# Altium PCB jlinkv9_only_usbc.PcbDoc
Units mil, origin at the board's own origin, x right, y up, seen from the top; angles counter-clockwise.
Board outline 709 x 1386.5 mil, 2 copper layers (Top Layer, Bottom Layer); 58 components, 74 nets, 200 pads, 169 vias.
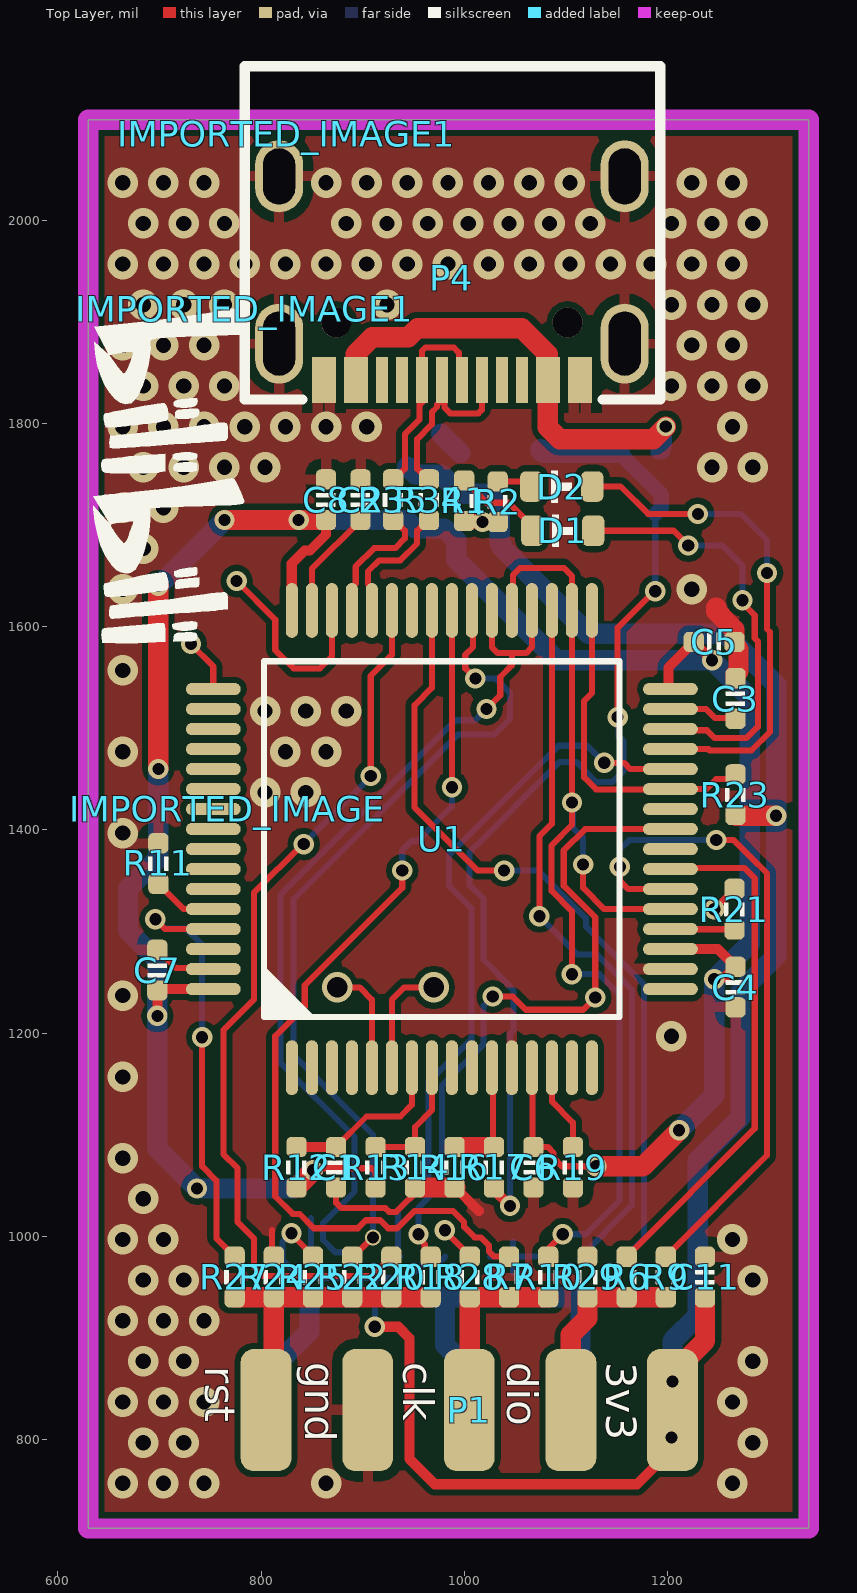
[diagram p0: Top Layer view]
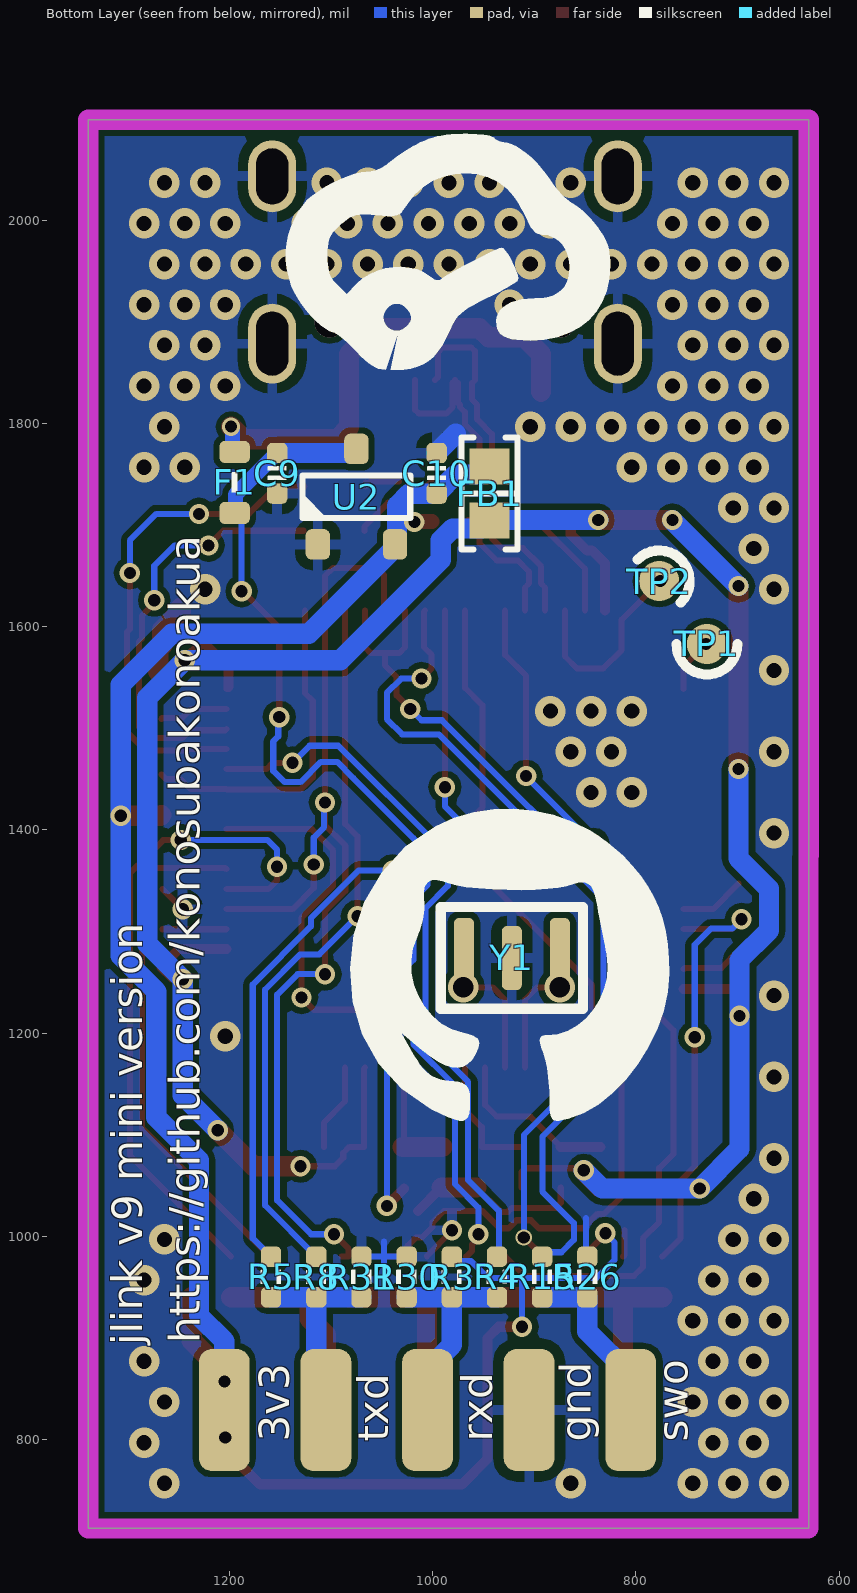
[diagram p1: Bottom Layer view, seen from below]
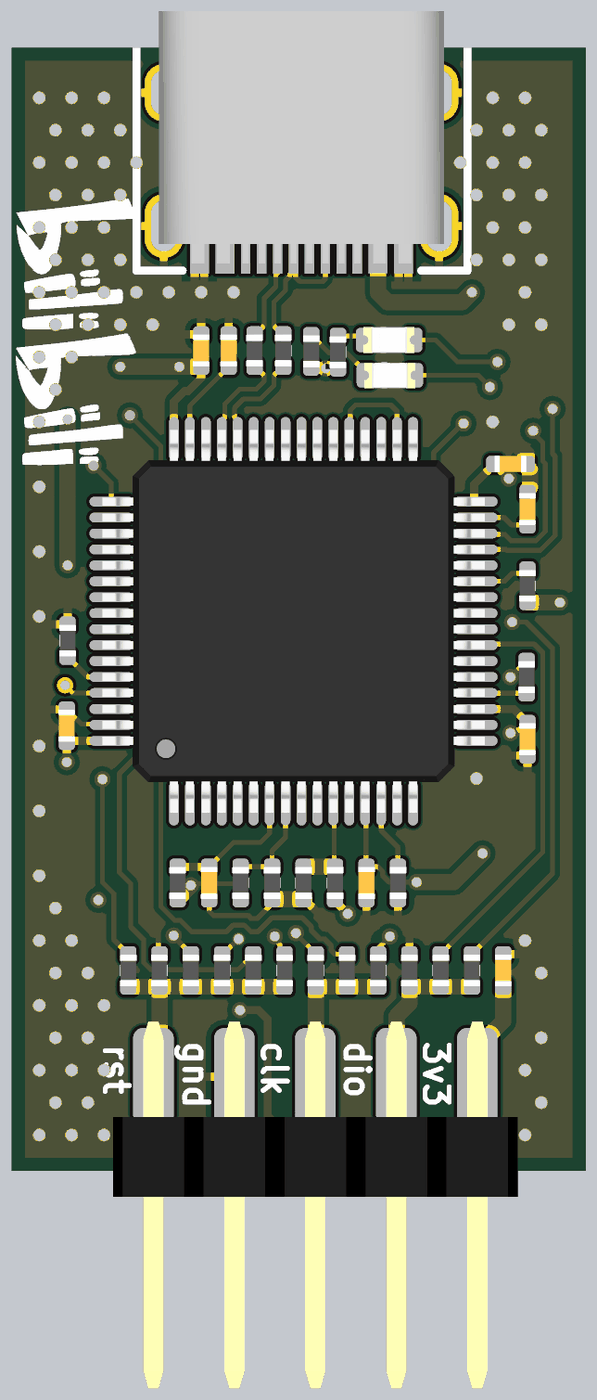
[diagram p2: 3D render of the assembled board from above, using the file's embedded part models]
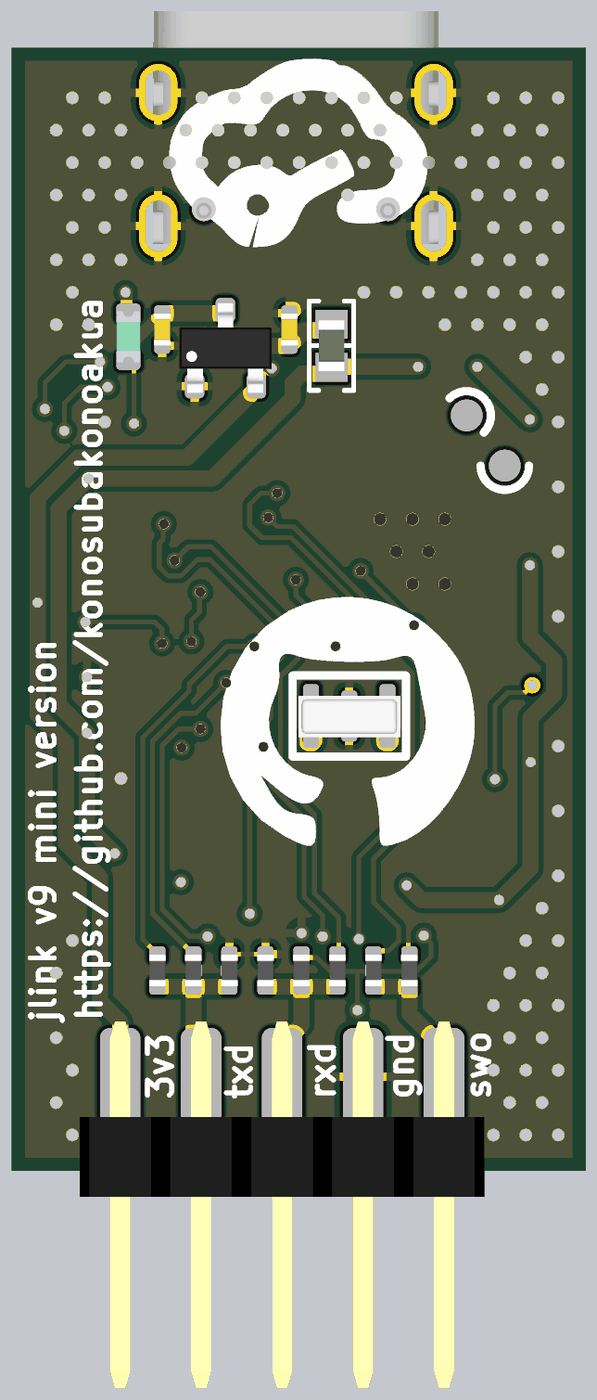
[diagram p3: 3D render of the assembled board from below, using the file's embedded part models]

## Layer stack, top to bottom
Top Solder: solder mask 0.4, Solder Resist, Dk 3.5
Top Layer: signal copper 1.4
Dielectric 1: dielectric 12.6, FR-4, Dk 4.8
Bottom Layer: signal copper 1.4
Bottom Solder: solder mask 0.4, Solder Resist, Dk 3.5

## Board outline
629.95,1375 629.95,2099 1338.95,2099 1338.95,712.5 630,712.5

## Design rules (kind name [scope] priority, off if disabled: settings)
Clearance [All] p1: gap=6 ignorepadtopadclearanceinfootprint=FALSE
ComponentClearance [All] p1: gap=0 collisioncheckmode=3 verticalgap=0 showdistances=FALSE
DiffPairsRouting [All] p1: maxlimit=10 minlimit=6 mostfreqgap=6 toplayer_minwidth=6 toplayer_maxwidth=20 toplayer_prefwidth=6 bottomlayer_minwidth=6 bottomlayer_maxwidth=20 bottomlayer_prefwidth=6 maxuncoupledlength=500
PolygonConnect [All] p1: connectstyle=Relief reliefconductorwidth=10 reliefentries=4 polygonreliefangle="90 Angle" airgapwidth=10
RoutingVias [All] p1: holewidth=28 width=50 viastyle="Through Hole" minholewidth=12 minwidth=20 maxholewidth=28 maxwidth=50
SolderMaskExpansion [All] p1: expansion=4
Width [All] p1: maxlimit=100 minlimit=6 preferedwidth=10
28 further rules are at their usual default settings.

## Classes and differential pairs
component class usb_conn: F1 P4 R34 R35
component class stm32: C1 C2 C3 C4 C5 C6 C7 C8 C9 C10 C11 D1 D2 FB1 P1 R1 R2 R3 R4 R5 R6 R7 R8 R9 R10 R11 R12 R13 R14 R15 R16 R17 R18 R19 R20 R21 R22 R23 R24 R25 R26 R27 R28 R29 R30 R31 TP1 TP2 U1 U2 Y1
differential pair usb_c: +usb_c_P -usb_c_N
differential pair mcu_usb: +mcu_usb_P -mcu_usb_N

## Components (designator, comment, footprint, x,y, rotation, side; value= is the part's Value field where it differs from the comment)
C1 "C0402" CAP_0402 873.86,1068.06 r270 top value=0.1u
C2 "C0402" CAP_0402 898,1725.06 r270 top value=2.2u
C3 "C0402" CAP_0402 1267,1529.39 r270 top value=2.2u
C4 "C0402" CAP_0402 1267,1245.39 r90 top value=0.1u
C5 "C0402" CAP_0402 1246,1585.06 r180 top value=0.1u
C6 "C0402" CAP_0402 1068.14,1068.06 r90 top value=0.1u
C7 "C0402" CAP_0402 698,1262.06 r270 top value=0.1u
C8 "C0402" CAP_0402 864,1725.06 r270 top value=0.1u
C9 "C0402" CAP_0402 1153,1751.06 r90 bottom value=0.1uf
C10 "C0402" CAP_0402 996,1751.06 r270 bottom value=0.1uf
C11 "C0402" CAP_0402 1237,960.06 r270 top value=0.1uf
D1 "color?" LED_0603 1097,1694.54 r0 top
D2 "color?" LED_0603 1096,1738.06 r0 top
F1 "500mA" PPTC_0603 1194.87,1742.06 r270 bottom
FB1 "Fer" "FER 0603/1608" 944,1731.06 r90 bottom
IMPORTED_IMAGE "Comment" IMPORTED_IMAGE 767,1421 r0 top
IMPORTED_IMAGE1 "Comment" IMPORTED_IMAGE 825.17,2085.07 r0 top (schematic designator IMPORTED_IMAGE)
IMPORTED_IMAGE1 "Comment" IMPORTED_IMAGE 783.95,1912.92 r270 top (schematic designator IMPORTED_IMAGE)
P1 "HDR2x5_2.54" HDR2X5_2.54_180H 1205,829.06 r270 top
P4 "TypeC" USB_TypeC 987.84,1943 r180 top
R1 "220r" RES_0402 1000,1724.06 r270 top
R2 "220r" RES_0402 1033,1723.06 r270 top
R3 "220r" RES_0402 981.11,960.06 r90 bottom
R4 "220r" RES_0402 936.64,960.06 r270 bottom
R5 "220r" RES_0402 1159,960.06 r270 bottom
R6 "220r" RES_0402 1159.83,960.06 r270 top
R7 "220r" RES_0402 1044.08,960.06 r270 top
R8 "220r" RES_0402 1114.53,960.06 r270 bottom
R9 "220r" RES_0402 1198.42,960.06 r270 top
R10 "220r" RES_0402 1082.67,960.06 r270 top
R11 "10k" RES_0402 699,1367.06 r90 top
R12 "10k" RES_0402 835,1068.06 r270 top
R13 "10k" RES_0402 912.71,1068.06 r90 top
R14 "10k" RES_0402 951.57,1068.06 r90 top
R15 "220r" RES_0402 892.17,960.06 r270 bottom
R16 "10k" RES_0402 990.43,1068.06 r90 top
R17 "10k" RES_0402 1029.29,1068.06 r270 top
R18 "220r" RES_0402 966.92,960.06 r270 top
R19 "10k" RES_0402 1107,1068.06 r90 top
R20 "220r" RES_0402 928.33,960.06 r270 top
R21 "10k" RES_0402 1266,1322.06 r270 top
R22 "220r" RES_0402 889.75,960.06 r270 top
R23 "10k" RES_0402 1267,1434.73 r90 top
R24 "220k" RES_0402 812.58,960.06 r270 top
R25 "10k" RES_0402 851.17,960.06 r270 top
R26 "220k" RES_0402 847.7,960.06 r270 bottom
R27 "10k" RES_0402 774,960.06 r270 top
R28 "220k" RES_0402 1005.5,960.06 r270 top
R29 "220k" RES_0402 1121.25,960.06 r270 top
R30 "220k" RES_0402 1025.59,960.06 r270 bottom
R31 "220k" RES_0402 1070.06,960.06 r270 bottom
R34 "22r" RES_0402 965.38,1725.06 r90 top
R35 "22r" RES_0402 930,1725.06 r90 top
TP1 "CLK" "TP Circle" 730,1583.06 r180 bottom
TP2 "DIO" "TP Circle" 777,1645.06 r45 bottom
U1 "STM32F205RET6" _LQFP_P0.5_64 978,1391.06 r90 top
U2 "XC6206P332MR" _SOT23-3 1075,1728.06 r90 bottom
Y1 "12MHz" "MURATA CSTCE" 922,1274.06 r0 bottom

## Footprints (in the part's own frame and the unit in brackets; to place one, negate y for a bottom-side part, rotate by r counter-clockwise, add the part's x,y. Pads: shape width x height; smd on the part's side, far side on the other; paste and mask are expansions set on the pad)
_LQFP_P0.5_64 [mil]
  oval 54x12 smd: 1(-225,147.64) 2(-225,127.95) 3(-225,108.27) 4(-225,88.58) 5(-225,68.9) 6(-225,49.21) 7(-225,29.53) 8(-225,9.84) 9(-225,-9.84) 10(-225,-29.53) 11(-225,-49.21) 12(-225,-68.9) 13(-225,-88.58) 14(-225,-108.27) 15(-225,-127.95) 16(-225,-147.64) 33(225,-147.64) 34(225,-127.95) 35(225,-108.27) 36(225,-88.58) 37(225,-68.9) 38(225,-49.21) 39(225,-29.53) 40(225,-9.84) 41(225,9.84) 42(225,29.53) 43(225,49.21) 44(225,68.9) 45(225,88.58) 46(225,108.27) 47(225,127.95) 48(225,147.64)
  oval 12x54 smd: 17(-147.64,-225) 18(-127.95,-225) 19(-108.27,-225) 20(-88.58,-225) 21(-68.9,-225) 22(-49.21,-225) 23(-29.53,-225) 24(-9.84,-225) 25(9.84,-225) 26(29.53,-225) 27(49.21,-225) 28(68.9,-225) 29(88.58,-225) 30(108.27,-225) 31(127.95,-225) 32(147.64,-225) 49(147.64,225) 50(127.95,225) 51(108.27,225) 52(88.58,225) 53(68.9,225) 54(49.21,225) 55(29.53,225) 56(9.84,225) 57(-9.84,225) 58(-29.53,225) 59(-49.21,225) 60(-68.9,225) 61(-88.58,225) 62(-108.27,225) 63(-127.95,225) 64(-147.64,225)
  silkscreen extent -175,-175 175,175, body extent -236,-236 236,236, height 59
_SOT23-3 [mil]
  rrect50% 30x24 smd: 1(-47,38) 2(-47,-38) 3(47,0)
  silkscreen extent -21,-53 21,53, body extent -55,-57 55,57, height 51
CAP_0402 [mil]
  rrect50% 20x20 smd: 1(-20,0) 2(20,0)
  silkscreen extent -7,-9 7,9, body extent -23,-10 23,10, height 22
"FER 0603/1608" [mm] "Chip Ferrite, 2-Leads, Body 1.60x0.80mm, IPC Medium Density"
  rect 0.9x1 smd: 1(-0.675,0) 2(0.675,0)
  silkscreen extent -1.4,-0.7 1.4,0.7, body extent -0.8,-0.41 0.8,0.41, height 0.82
HDR2X5_2.54_180H [mil]
  rrect50% 120x50 smd: 1(0,0) 3(0,-100) 5(0,-200) 7(0,-300) 9(0,-400)
  rrect50% 120x50 smd far side: 2(0,0) 4(0,-100) 6(0,-200) 8(0,-300) 10(0,-400)
  body extent -68,-450 385,50, height 100
IMPORTED_IMAGE [mil]
LED_0603 [mil]
  rrect50% 22x30 smd: 1(-30,0) 2(30,0)
  silkscreen extent -10,-16 10,16, body extent -31,-16 32,16, height 21
"MURATA CSTCE" [mm] "murata CSTCE serials crystal"
  rrect50% 0.5x2 smd: 1(-1.199,0) 3(1.199,0)
  rrect50% 0.5x1.6 smd: 2(0,0)
  silkscreen extent -1.78,-1.27 1.78,1.27, body extent -1.6,-0.64 1.6,1.52, height 1.02
PPTC_0603 [mil]
  rrect50% 22x30 smd: 1(-30,0) 2(30,0)
  silkscreen extent -10,-3 10,3, body extent -31,-15 31,15, height 30
RES_0402 [mil]
  rrect50% 20x20 smd: 1(-20,0) 2(20,0)
  silkscreen extent -7,-10 7,10, body extent -20,-10 20,10, height 16
"TP Circle" [mm]
  round 1 smd: 1(0,0)
  silkscreen extent -0.76,-0.76 0.76,0
USB_TypeC [mm]
  oval 1.2x1.8 hole 0.8 slot 1.4 at 90 deg: 0(-4.32,-2.547) 0(4.32,-2.547)
  oval 1.2x2 hole 0.8 slot 1.6 at 90 deg: 0(-4.32,1.633) 0(4.32,1.633)
  rect 0.3x1.15 smd: A1(-3.35,2.546) A4(-2.55,2.543) A5(-1.25,2.547) A6(-0.25,2.547) A7(0.25,2.546) A8(-1.75,2.547) A9(2.55,2.547) A12(3.35,2.547) B1(3.05,2.547) B4(2.25,2.547) B5(1.75,2.547) B6(0.75,2.547) B7(-0.75,2.546) B8(1.25,2.547) B9(-2.25,2.543) B12(-3.05,2.546)
  round 0.75 hole 0.75 unplated: ""(-2.89,1.102) ""(2.89,1.102)
  silkscreen extent -5.21,-5.3 5.18,3.03, body extent -4.47,-5.1 4.47,2.8, height 3.21

## Part data
C1 C2 C3 C4 C5 C6 C7 C8 C9 C10 C11: library part Cap_0402, "Capacitor", Specification="X7R 50V", Type=0402
D1 D2: library part LED_0603, "LED", Type=0603
F1: library part Fuse, "resettable fuse"
FB1: "Ferrite Bead"
P1: "Header"
P4: library part USB_TypeC, "USB type-c cable"
R1 R2 R3 R4 R5 R6 R7 R8 R9 R10 R11 R12 R13 R14 R15 R16 R17 R18 R19 R20 R21 R22 R23 R24 R25 R26 R27 R28 R29 R30 R31 R34 R35: library part Res, "SMT Resistor"
TP1 TP2: library part "Test Point", "Test"
U1: "ARM Cortex-M3 32-bit MCU, 512 KB Flash, 128 KB Internal RAM, 51 I/Os, 64-pin LQFP, -40 to 85 degC, Tray", I/Os (High Current)=51, Operating Frequency(F) (Processor speed) (MHz)=120, Supplier Part Number 1=497-11155-ND, Supply Voltage(Vcc) min (V)=1.8, ComponentLink1Description="Manufacturer URL", ComponentLink1URL=http://www.st.com/web/en/home.html, ComponentLink2Description=Datasheet, ComponentLink2URL=http://www.st.com/st-web-ui/static/active/en/resource/technical/document/datasheet/CD00237391.pdf, ComponentLink3Description="Package Specification", ComponentLink3URL=http://www.st.com/st-web-ui/static/active/en/resource/technical/document/datasheet/DM00037051.pdf, Core="ARM Cortex-M3", D/A Converter="2x12-bit (2 Channel)", DatasheetVersion="Rev. 9", FLASH Size (Prog) (kB)=512, Internal RAM Size (kB)=128, Mounting Technology="Surface Mount", PackageDescription="64-Pin Low Profile Quad Flat Package, 10 x 10 mm Body, 0.5 mm Pitch", PackageReference=LQFP64, PackageVersion="Rev. 4, 06/2013", Packing=Tray, PartNumber=STM32F205RET6, Supplier 1=Digi-Key, Supplier 2=Farnell, Supplier 3=Newark, Supplier 4=Mouser, Supplier Part Number 2=2060897, Supplier Part Number 3=47T9329, Supplier Part Number 4=511-STM32F205RET6
U2: "Regulator LDO"
Y1: library part XTAL_MURATA_3P, "Crystal Oscillator With Caps Inside"

## Via types
v1: diameter 30, hole 15, Top Layer to Bottom Layer, tented both sides, 117 vias
v2: diameter 20, hole 12, Top Layer to Bottom Layer, tented both sides, 45 vias
v3: diameter 20, hole 12, Top Layer to Bottom Layer, 3 vias
v4: diameter 30, hole 20, Top Layer to Bottom Layer, tented both sides, 2 vias
v5: diameter 18, hole 12, Top Layer to Bottom Layer, tented both sides, 1 vias
v6: diameter 16, hole 12, Top Layer to Bottom Layer, tented both sides, 1 vias

## Nets (pads, with @x,y where several pads share a name; then routed paths per layer and width w, separated by ;. In a path a pad name is that pad's centre, name@x,y a point inside that pad or via, vN(x,y) a via of type N, cw(c..) or ccw(c..) an arc to the next point about the centre after c; other vN are vias at no path point)
+3V3: C4.2 C5.2 C6.2 C7.2 C8.2 FB1.1 R12.2 R13.1 U1.13 U1.19 U1.32 U1.48 U1.64 | length 2646.8
  Top Layer w6: C7.2 C7.2@699.36,1243.42 ; U1.48@830.18,1616.24 U1.48 ; R12.2 R12.2@835,1048.48 ; v2@851.17,1064.64 v2(851.17,1065.06) 853.17,1067.06 908.94,1067.06 912.71,1063.29 R13.1 ; U1.13 1067.36,1165.28 1067.36,1088.06 C6.2 1082,1088.06 1088,1082.06 1088,1077.26 1096.2,1069.06 v2(1130,1069.06) ; U1.32@1201,1540.7 U1.32
  Top Layer w10: v2(698,1217.06) C7.2 ; C7.2@699.36,1243.42 U1.64 ; U1.48@830.18,1616.24 830.18,1662.24 843,1675.06 848.2,1675.06 864,1690.86 C8.2 ; U1.32@1201,1540.7 1201,1560.06 C5.2 v2(1244,1567.06) ; U1.19 1249.6,1282.79 C4.2 1256.58,1254.97 1247.91,1254.97 v2(1246,1253.06)
  Top Layer w20: v2(699,1460.06) v2(699,1640.06) ; v2(764,1705.06) v2(837,1705.06) C8.2 ; R12.2@835,1048.48 v2@851.17,1064.64 ; v2(1130,1069.06) 1176,1069.06 v2(1211.5,1104.56)
  Bottom Layer w10: FB1.1@943.43,1705.06 FB1.1
  Bottom Layer w20: v2(699,1460.06) 699,1372.06 669,1342.06 669,1301.06 698,1272.06 v2(698,1217.06) 698,1086.06 v2(737,1047.06) 833.17,1047.06 v2(851.17,1065.06) ; v2(699,1640.06) v2(764,1705.06) ; v2(837,1705.06) FB1.1@943.43,1705.06 ; FB1.1 951.72,1696.77 980.28,1696.77 992,1685.05 992,1666.06 1091,1567.06 v2(1244,1567.06) 1281,1530.06 1281,1288.06 v2(1246,1253.06) 1246,1139.06 v2(1211.5,1104.56)
+3V3_ldo: C10.2 C11.2 FB1.2 P1.1 P1.2 R1.2 R2.2 R3.2 R23.1 R25.1 U2.2 | length 2096.1
  Top Layer w6: v2(830,1003.06) 830,1002.14 851.17,980.98 R25.1 ; R1.2 R1.2@1000.5,1703.56 ; R2.2@1032.5,1703.56 R2.2
  Top Layer w10: v2(912,911.06) 935,911.06 946,900.06 946,781.06 971,756.06 1170,756.06 P1.1@1202,788.06
  Top Layer w15: R1.2@1000.5,1703.56 R2.2@1032.5,1703.56
  Top Layer w20: v3(1205,857.06) 1205,865.41 1237,897.41 C11.2 ; R23.1 1267.67,1414.06 v2(1307,1414.06)
  Bottom Layer w6: v2(830,1003.06) 821,994.06 821,976.96 838.9,959.06 902.97,959.06 912,959.06 ; v2(912,911.06) 912,959.06 ; R3.2 976.79,975.73 962.11,975.73 945.44,959.06 912,959.06
  Bottom Layer w20: FB1.2 951.72,1749.92 977.14,1749.92 C10.2 1023.28,1731.06 1035,1719.34 1035,1683.06 U2.2 1037,1678.06 1122,1593.06 1257,1593.06 1307,1543.06 v2(1307,1414.06) 1307,1276.06 1272,1241.06 1272,1117.06 1230,1075.06 1230,922.06 1205,897.06 v3(1205,857.06)
  other v2: 1017.95,1703.06
  other v3: 1204.15,802.06
+5V: C9.2 F1.2 R17.2 U2.3 | length 1027.2
  Top Layer w6: v2(1151,1511.06) 1151,1599.06 1187,1635.06 v2(1188,1635.06)
  Top Layer w10: R17.2@1028.14,1046.92 v2(1045,1030.06)
  Bottom Layer w6: v2@1047,1032.06 v2(1045,1030.06) 1045,1199 1048.51,1202.51 1048.51,1242.41 1045,1245.93 1045,1246.06 1019,1272.06 1019,1332.07 1005,1346.07 1005,1378.09 1019,1392.09 1077.96,1451.04 1093.91,1467 1110.07,1467 1129.97,1447.1 1145.71,1447.1 1156.84,1458.23 1156.84,1487.16 1151.94,1492.06 1151.94,1510.12 v2(1151,1511.06) ; v2(1188,1635.06) F1.2@1188,1711.06
  Bottom Layer w15: C9.2 1194,1730.06 1194,1717.06 F1.2@1188,1711.06
  Bottom Layer w20: U2.3 1075,1773.06 1077,1771.06 C9.2
+VBUS: F1.1 P4.A4 P4.A9 P4.B4 P4.B9 | length 476.8
  Top Layer w20: 893.35,1831.29 893.35,1868.56 909.62,1884.83 944.92,1884.83 953.96,1893.87 1056.75,1893.87 1082.33,1868.29 1082.33,1796.39 1094.04,1784.67 1186.09,1784.67 v5(1198.42,1797)
  Bottom Layer w15: F1.1 1190.87,1772.06 1192.87,1774.06 1197,1778.19 v5@1197,1797
GND: C1.2 C2.1 C3.1 C4.1 C5.1 C6.1 C7.1 C8.1 C9.1 C10.1 C11.1 P1.7 P1.8 P4.0 P4.A1 P4.A12 P4.B1 P4.B12 R11.2 R14.1 R16.1 R19.1 R21.1 R24.1 R26.1 R28.1 R29.1 R30.1 R31.1 U1.12 U1.18 U1.63 U2.1 Y1.2 | length 559.2
  Top Layer w6: C7.1 715.92,1264.14 751.97,1264.14 U1.63 ; 811,1006.01 811,981.64 R24.1 ; C1.2 873.86,1033.14 879.15,1027.85 922.26,1027.85 926.05,1024.06 933.11,1024.06 957.11,1048.06 R14.1 ; v2(980.95,1006.06) 980.95,1005.33 1005.5,980.79 R28.1 ; v2(1246,1322.06) 1261,1337.06 R21.1
  Top Layer w10: R16.1@991.35,1048.06 1014.35,1025.06
  Top Layer w20: R14.1@957.11,1048.06 R16.1@991.35,1048.06 ; 1247.95,1619.06 1247.95,1615.29 1266,1597.24 1266,1581.83 1270,1577.83 1270,1556.29 1267,1553.29 C3.1
  Bottom Layer w6: R26.1 849,981.36 849,1018.07 ; R30.1 1047.95,980.06 ; 1047.95,963.84 1047.95,980.06 ; 1047.95,995.11 1047.95,980.06 ; R31.1 1047.95,980.06
  Bottom Layer w20: 977.1,1789.96 C10.1
  other v1: 664,757 704,757 744,757 864,757 1264,757 684,797 724,797 1284,797 664,837 704,837 744,837 1264,837 684,877 724,877 1284,877 664,917 704,917 744,917 684,957 724,957 1284,957 664,997 704,997 1264,997 684,1037 664,1077 664,1157 1204,1197 664,1237 664,1397 804,1437 844,1437 664,1477 824,1477 864,1477 804,1517 844,1517 884,1517 664,1557 664,1637 1224,1637 684,1677 664,1717 704,1717 684,1757 724,1757 764,1757 804,1757 1244,1757 1284,1757 664,1797 704,1797 744,1797 784,1797 824,1797 864,1797 904,1797 1264,1797 684,1837 724,1837 764,1837 1204,1837 1244,1837 1284,1837 664,1877 704,1877 744,1877 1224,1877 1264,1877 684,1917 724,1917 764,1917 924,1917 1204,1917 1244,1917 1284,1917 664,1957 704,1957 744,1957 784,1957 824,1957 864,1957 904,1957 944,1957 984,1957 1024,1957 1064,1957 1104,1957 1144,1957 1184,1957 1224,1957 1264,1957 684,1997 724,1997 764,1997 884,1997 924,1997 964,1997 1004,1997 1044,1997 1084,1997 1124,1997 1204,1997 1244,1997 1284,1997 664,2037 704,2037 744,2037 864,2037 904,2037 944,2037 984,2037 1024,2037 1064,2037 1104,2037 1224,2037 1264,2037
jlink_rx: 
jlink_tx: 
mcu_usb_N: R34.1 U1.44 | length 128.4
  Top Layer w6: U1.44 909.1,1638.68 905.26,1642.53 905.26,1654.43 916.25,1665.42 937.13,1665.42 953.69,1681.98 953.69,1694.54 957.2,1698.06 957.29,1698.06 964.29,1705.06 R34.1
mcu_usb_P: R35.1 U1.45 | length 128.4
  Top Layer w6: U1.45 889.42,1638.68 893.26,1642.53 893.26,1659.4 911.28,1677.42 932.16,1677.42 941.69,1686.95 941.69,1694.54 938.17,1698.06 938.08,1698.06 931.08,1705.06 R35.1
NetC1_1: C1.1 R12.1 U1.7 | length 167.2
  Top Layer w6: C1.1 903.8,1118 937,1118 948.47,1129.47 U1.7
  Top Layer w10: R12.1 C1.1
NetC2_2: C2.2 U1.47 | length 108.9
  Top Layer w6: U1.47 850.05,1657.11 C2.2
NetC3_2: C3.2 U1.31 | length 68
  Top Layer w6: U1.31 1238.05,1519.01 1247,1510.06 1266.33,1510.06 C3.2
NetD1_1: D1.1 R1.1 | length 90
  Top Layer w6: R1.1 1022,1722.06 1043.8,1722.06 1067,1698.86 D1.1
NetD2_1: D2.1 R2.1 | length 39.1
  Top Layer w6: R2.1 1061,1743.06 D2.1 D2.1@1066,1742.06
NetD3_2: 
NetR11_1: R11.1 U1.60 | length 64.3
  Top Layer w6: R11.1 723.9,1322.16 U1.60
NetU1_5: U1.5 Y1.1 | length 106
  Top Layer w6: v4(875,1245.06) 897,1245.06 909.1,1232.96 U1.5
NetU1_6: U1.6 Y1.3 | length 113.1
  Top Layer w6: U1.6 928.79,1232.85 941,1245.06 v4(970,1245.06)
PA0: R19.2 U1.14 | length 86.6
  Top Layer w6: U1.14 1086.27,1132.79 1107,1112.06 R19.2
PA1: U1.15
PA2: U1.16
PA3: U1.17
PA4: R21.2 U1.20 | length 63.2
  Top Layer w6: U1.20 1203.21,1302.27 1265.79,1302.27 R21.2
PA5: R10.1 U1.21 U1.34 U1.37 | length 1054.1
  Top Layer w6: U1.37 1048.05,1617.21 1048.05,1651.1 1055,1658.06 1098,1658.06 1105.95,1650.11 U1.34 1106,1616.01 v2(1106,1427.06) 1106,1404.9 1086,1384.9 1086,1340.06 1105.95,1320.11 v2(1105.95,1258.06) ; R10.1@1089.67,980.06 R10.1 1082.67,987.73 v2(1097,1002.06) ; v2(1117,1366.06) 1117,1343 1137.84,1322.16 U1.21
  Bottom Layer w6: v2(1097,1002.06) 1119.56,1002.06 1153,1035.5 1153,1237.93 1132.87,1258.06 v2(1105.95,1258.06) ; v2(1106,1427.06) 1107,1426.06 1107,1402.42 1117,1392.42 v2(1117,1366.06)
PA6: R9.1 U1.22 | length 664.6
  Top Layer w6: v2(1153.21,1363.76) 1153.21,1350.19 1161.55,1341.85 U1.22 ; R9.1 1298,1079.64 1298,1357.27 1281.61,1373.66 1265.21,1390.06 v2(1248,1390.06)
  Bottom Layer w6: v2(1153.21,1363.76) 1153.21,1380.88 1162.39,1390.06 v2(1248,1390.06)
PA7: R6.1 U1.23 | length 512.3
  Top Layer w6: R6.1 1286,1106.23 1286,1352.3 1275.62,1362.68 1204.15,1362.68 U1.23
PA8: R5.1 U1.41 | length 779.2
  Top Layer w6: U1.41 968.16,1539.81 951.08,1522.74 951.08,1422.09 1013.17,1360 v2(1039.24,1360)
  Bottom Layer w6: v2(1039.24,1360) 1073.07,1360 1119.74,1313.33 1119.74,1305.13 1177,1247.87 1177,998.06 R5.1
PA9: U1.42
PA10: R20.1 U1.43 | length 874.7
  Top Layer w6: v2(842,1386.06) 841,1386.06 793,1338.06 793,1233.06 763,1203.06 763,1081.06 777,1067.06 777,1014.06 793,998.06 793,969.84 801.78,961.06 909.33,961.06 R20.1 ; v2(908,1453.06) 908,1551.64 928.79,1572.43 U1.43
  Bottom Layer w6: v2(842,1386.06) 842,1386.56 908,1452.56 v2(908,1453.06)
PA13: TP2.1 U1.46 | length 197.1
  Top Layer w6: v2(776,1645.06) 814,1607.06 814,1577.06 832,1559.06 858.03,1559.06 869.73,1570.76 U1.46
PA14: TP1.1 U1.49 | length 53.5
  Top Layer w6: v2(731,1583.06) 753,1561.06 U1.49
PA15: U1.50
PB0: U1.26
PB1: R23.2 U1.27 U1.33 | length 327.4
  Top Layer w6: U1.33 1125.64,1534.7 1118,1527.06 1118,1451.79 1129.78,1440.01 1202.74,1440.01 U1.27 1238.21,1440.27 1248,1450.06 1262.33,1450.06 R23.2
PB2: R4.1 U1.28 | length 707
  Top Layer w6: v2(1137.84,1466.1) 1157.38,1466.1 1163.52,1459.96 U1.28
  Bottom Layer w6: R4.1 934.79,981.91 934.79,1025.21 965,1055.42 965,1152.06 1007,1194.06 1007,1323.03 984.95,1345.07 984.95,1375.01 1007,1397.06 1080,1470.06 1092.88,1482.94 1121,1482.94 v2(1137.84,1466.1)
PB3: U1.55
PB4: U1.56
PB5: U1.57
PB6: U1.58
PB7: U1.59
PB8: R27.1 U1.61 | length 437.6
  Top Layer w6: v3(696,1312.06) 705.58,1302.48 U1.61 ; v2(742,1196.06) 742,1068.93 756,1054.93 756,998.06 R27.1
  Bottom Layer w6: v3(696,1312.06) 705.06,1303 726.06,1303 742,1287.06 v2(742,1196.06)
PB9: U1.62
PB10: D2.2 U1.29 | length 489.7
  Top Layer w6: D2.2 1153.92,1738.06 1180.92,1711.06 v2(1229.95,1711.06) ; U1.29 1240.34,1479.64 1241.59,1478.39 1282.77,1478.39 1301,1496.62 1301,1594.84 1298,1597.84 v2(1298,1653.01)
  Bottom Layer w6: v2(1229.95,1711.06) 1271.95,1711.06 1298,1685.01 v2(1298,1653.01)
PB11: D1.2 U1.30 | length 420.3
  Top Layer w6: D1.2 1206.1,1694.54 v2(1220.59,1680.06) ; U1.30 1204.15,1498.18 1238.77,1498.18 1246.56,1490.39 1277.8,1490.39 1289,1501.59 1289,1585.7 1286,1588.7 1286,1611.24 1273.95,1623.28 v2(1273.95,1626.06)
  Bottom Layer w6: v2(1220.59,1680.06) 1253.95,1680.06 1273.95,1660.06 v2(1273.95,1626.06)
PB14: R8.1 U1.35 | length 710.7
  Top Layer w6: v2(1074,1315.06) 1074,1393.79 1086.27,1406.06 U1.35
  Bottom Layer w6: v2(1074,1315.06) 1111.42,1277.64 1130.26,1277.64 1165,1242.9 1165,1030.53 R8.1
PB15: R15.1 U1.36 U1.38 | length 881.5
  Top Layer w6: v2(1022,1519.06) 1035.5,1532.56 1035.5,1550.56 1047,1562.06 1047,1574.06 ; U1.38 1027.21,1579.85 1033,1574.06 1047,1574.06 ; U1.36 1066.58,1579.64 1061,1574.06 1047,1574.06
  Bottom Layer w6: R15.1 887.84,984.39 873.17,984.39 861,996.56 861,1013.1 892,1044.1 892,1098.06 819,1171.06 819,1336.06 991,1508.06 991.06,1508 1010.94,1508 v2(1022,1519.06)
PC0: R13.2 R14.2 U1.8 | length 123.7
  Top Layer w6: R13.2 R14.2 951.57,1107.63 968.16,1124.22 U1.8
PC1: U1.9
PC2: U1.10
PC3: R16.2 R17.1 U1.11 | length 117.7
  Top Layer w6: U1.11 1028.25,1165.02 1028.25,1089.1 R17.1
  Top Layer w20: R16.2 R17.1
PC4: U1.24
PC5: R18.1 U1.25 | length 674
  Top Layer w6: v2(954.95,1002.06) 954.95,998.27 961.15,992.07 961.15,985.82 R18.1 ; v2(1028,1236.06) 1047.74,1236.06 1060.74,1223.06 1117,1223.06 v2(1129,1235.06) 1129,1314.03 1098,1345.03 1098,1379.93 1118.97,1400.9 U1.25
  Bottom Layer w6: v2(954.95,1002.06) 954.95,1028.4 978,1051.45 978,1148.09 1019,1189.09 1019,1227.06 v2(1028,1236.06)
PC8: R22.1 U1.39 | length 820.8
  Top Layer w6: R22.1@889.75,980.06 890.83,980.06 909.62,998.85 v6(910.25,998.85) ; U1.39 1008.68,1614.91 1008.68,1580.09 1001,1572.41 1001,1559.06 v2(1011,1549.06)
  Bottom Layer w6: v6(910.25,998.85) 910.25,1099.81 832,1178.06 832,1332.09 993.97,1494.06 1030,1494.06 1045,1509.06 1045,1535.06 1031,1549.06 v2(1011,1549.06)
PC9: R7.1 U1.40 | length 933.6
  Top Layer w6: v2(939,1360.06) 939,1343 843,1247 843,1226.06 814,1197.06 814,1039.26 831.2,1022.06 837.87,1022.06 851.93,1008 895.36,1008 903.21,1015.85 917.29,1015.85 925.14,1008 934.02,1008 951.08,1025.06 988.82,1025.06 999.95,1013.93 999.95,1009.49 1010.38,999.06 1016.3,999.06 1024.5,990.86 1024.5,984.94 1029.38,980.06 R7.1 ; U1.40 987.84,1442.28 v2(987.97,1442.16)
  Bottom Layer w6: v2(939,1360.06) 939,1380 948.06,1389.06 953.83,1389.06 987.97,1423.2 v2(987.97,1442.16)
PC10: U1.51
PC11: U1.52
PC12: U1.53
PC13: U1.2
PC14: U1.3
PC15: U1.4
RST: P1.9 R18.2 R20.2 R22.2 R24.2 R25.2 R27.2 | length 307.1
  Top Layer w6: P1.9 P1.9@812.58,836.64
  Top Layer w20: R27.2 R24.2 ; P1.9@812.58,836.64 R24.2 ; R18.2 R20.2 R22.2 R25.2 R24.2
RXD: P1.6 R3.1 R4.2 R30.2 | length 209.8
  Bottom Layer w6: P1.6 P1.6@1005,869.2
  Bottom Layer w20: R4.2 R3.1 ; P1.6@1005,869.2 981.11,893.09 R3.1 ; R30.2 R3.1
swd_3v3: 
swd_clk: 
swd_dio: 
swd_gnd: 
swd_rst: 
swd_swo: 
TCK: P1.5 R7.2 R10.2 R28.2 | length 188.4
  Top Layer w6: P1.5 P1.5@1005.5,829.56
  Top Layer w20: P1.5@1005.5,829.56 R28.2 R10.2
TDI: P1.4 R5.2 R8.2 R31.2 | length 203.9
  Bottom Layer w6: P1.4 P1.4@1114.51,838.57
  Bottom Layer w20: R31.2 R8.2 R5.2 ; P1.4@1114.51,838.57 R8.2@1114.51,940.04
TDO: P1.10 R15.2 R26.2 | length 173.2
  Bottom Layer w6: P1.10 P1.10@805,864.06
  Bottom Layer w20: P1.10@805,864.06 847.7,906.76 R26.2 R15.2
TMS: P1.3 R6.2 R9.2 R29.2 | length 194.9
  Top Layer w20: P1.3 1105,903.06 1121.25,919.31 R29.2 R6.2 R9.2
usb_c_N: P4.A7 P4.B7 R34.2 | length 211.1
  Top Layer w6: R34.2 964.29,1745.06 957.29,1752.06 957.2,1752.06 953.69,1755.57 953.69,1784.67 968.16,1799.14 968.16,1811.28 973.22,1816.34 973.22,1818.66 975.1,1820.54 975.1,1839.86 P4.A7 980.4,1840.37 980.4,1815.89 986.17,1810.12 1013.86,1810.12 1017.37,1813.64 P4.B7
usb_c_P: P4.A6 P4.B6 R35.2 | length 209.5
  Top Layer w6: R35.2 931.08,1745.06 938.08,1752.06 938.17,1752.06 941.69,1755.57 941.69,1789.64 956.16,1804.11 956.16,1818.57 961.22,1823.63 961.22,1839.8 P4.B6 958.31,1871.35 961.83,1874.87 989.85,1874.87 994.78,1869.94 994.78,1845.61 P4.A6
pads on no net: P4. P4.A5 P4.A8 P4.B5 P4.B8 U1.1 U1.54

## Polygon pours and split planes (outlines as drawn)
GND on Bottom Layer "Bottom Layer-GND" (solid, remove dead copper, pour order 2): 1333.95,2099 635.95,2099 635.95,700.06 1333.95,700.06
GND on Top Layer "Top Layer-GND" (solid, remove dead copper, pour order 0): 1328.41,2099 635.95,2099 635.95,700.06 1333.95,700.06

## Keep-outs
Keep-Out Layer:
  the board outline again, w20

## Silkscreen, mask and mechanical layers (free items; w line width, h text height)
Top Overlay:
  text "gnd" at 843.42,876 h30 r270
  text "clk" at 940.17,876 h30 r270
  text "dio" at 1042.5,876 h30 r270
  text "3v3" at 1140,876 h30 r270
  text "rst" at 745,872 h30 r270
Bottom Overlay:
  text "https://github.com/konosubakonoakua" at 1229,895 h30 r270
  text "jlink v9 mini version" at 1286,893 h30 r270
  text "swo" at 749,798 h30 r270
  text "gnd" at 844.42,798 h30 r270
  text "rxd" at 941.17,798 h30 r270
  text "txd" at 1043.5,798 h30 r270
  text "3v3" at 1141,798 h30 r270